# Altium PCB PCB1.PcbDoc
Units mil, origin at the board's own origin, x right, y up, seen from the top; angles counter-clockwise.
Board outline 2580 x 2395 mil, 2 copper layers (Top Layer, Bottom Layer); 19 components, 23 nets, 96 pads, 1 vias.
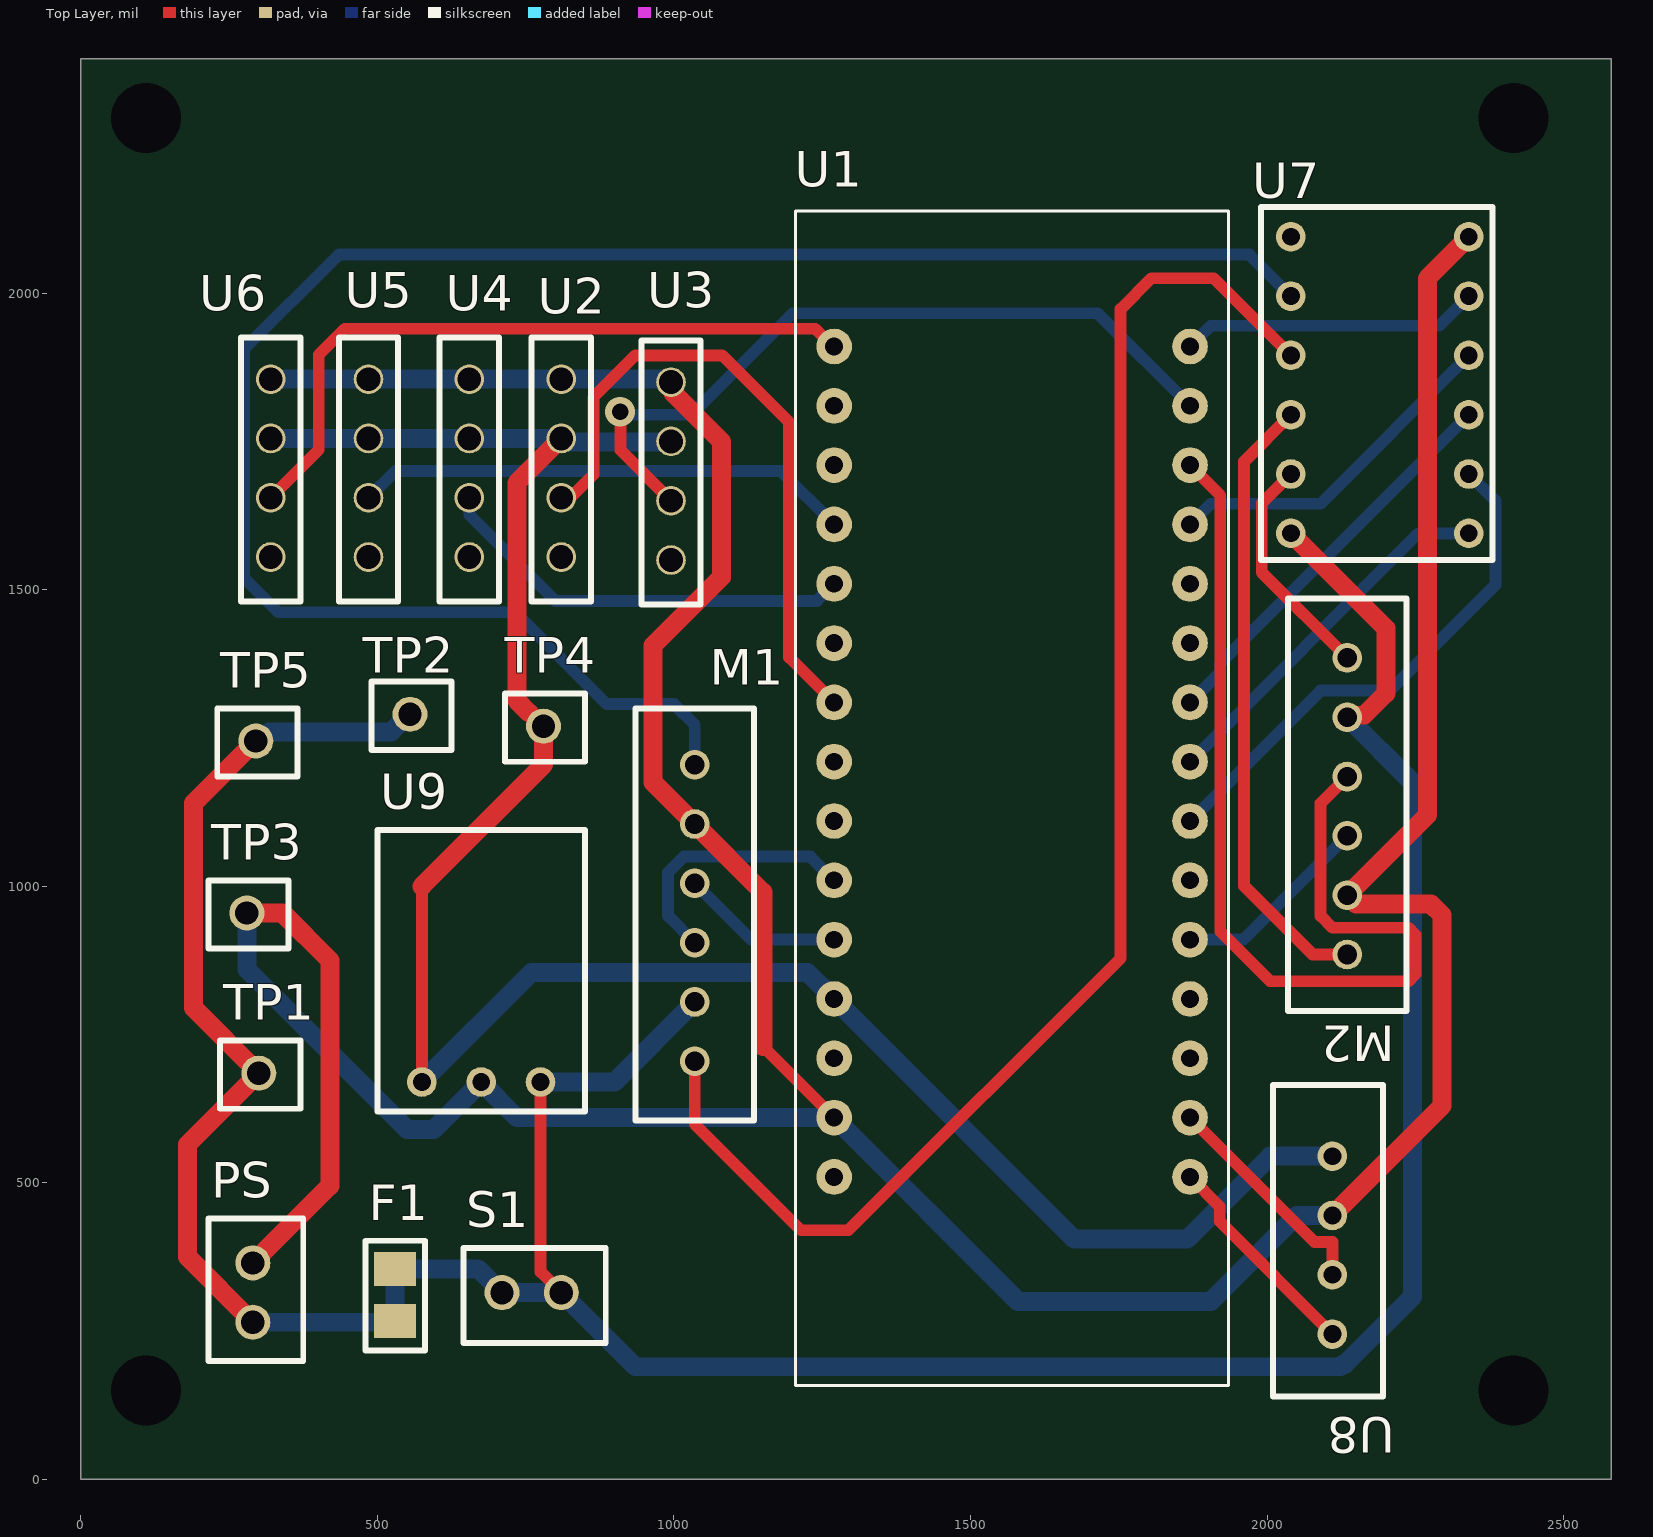
[diagram p0: Top Layer view]
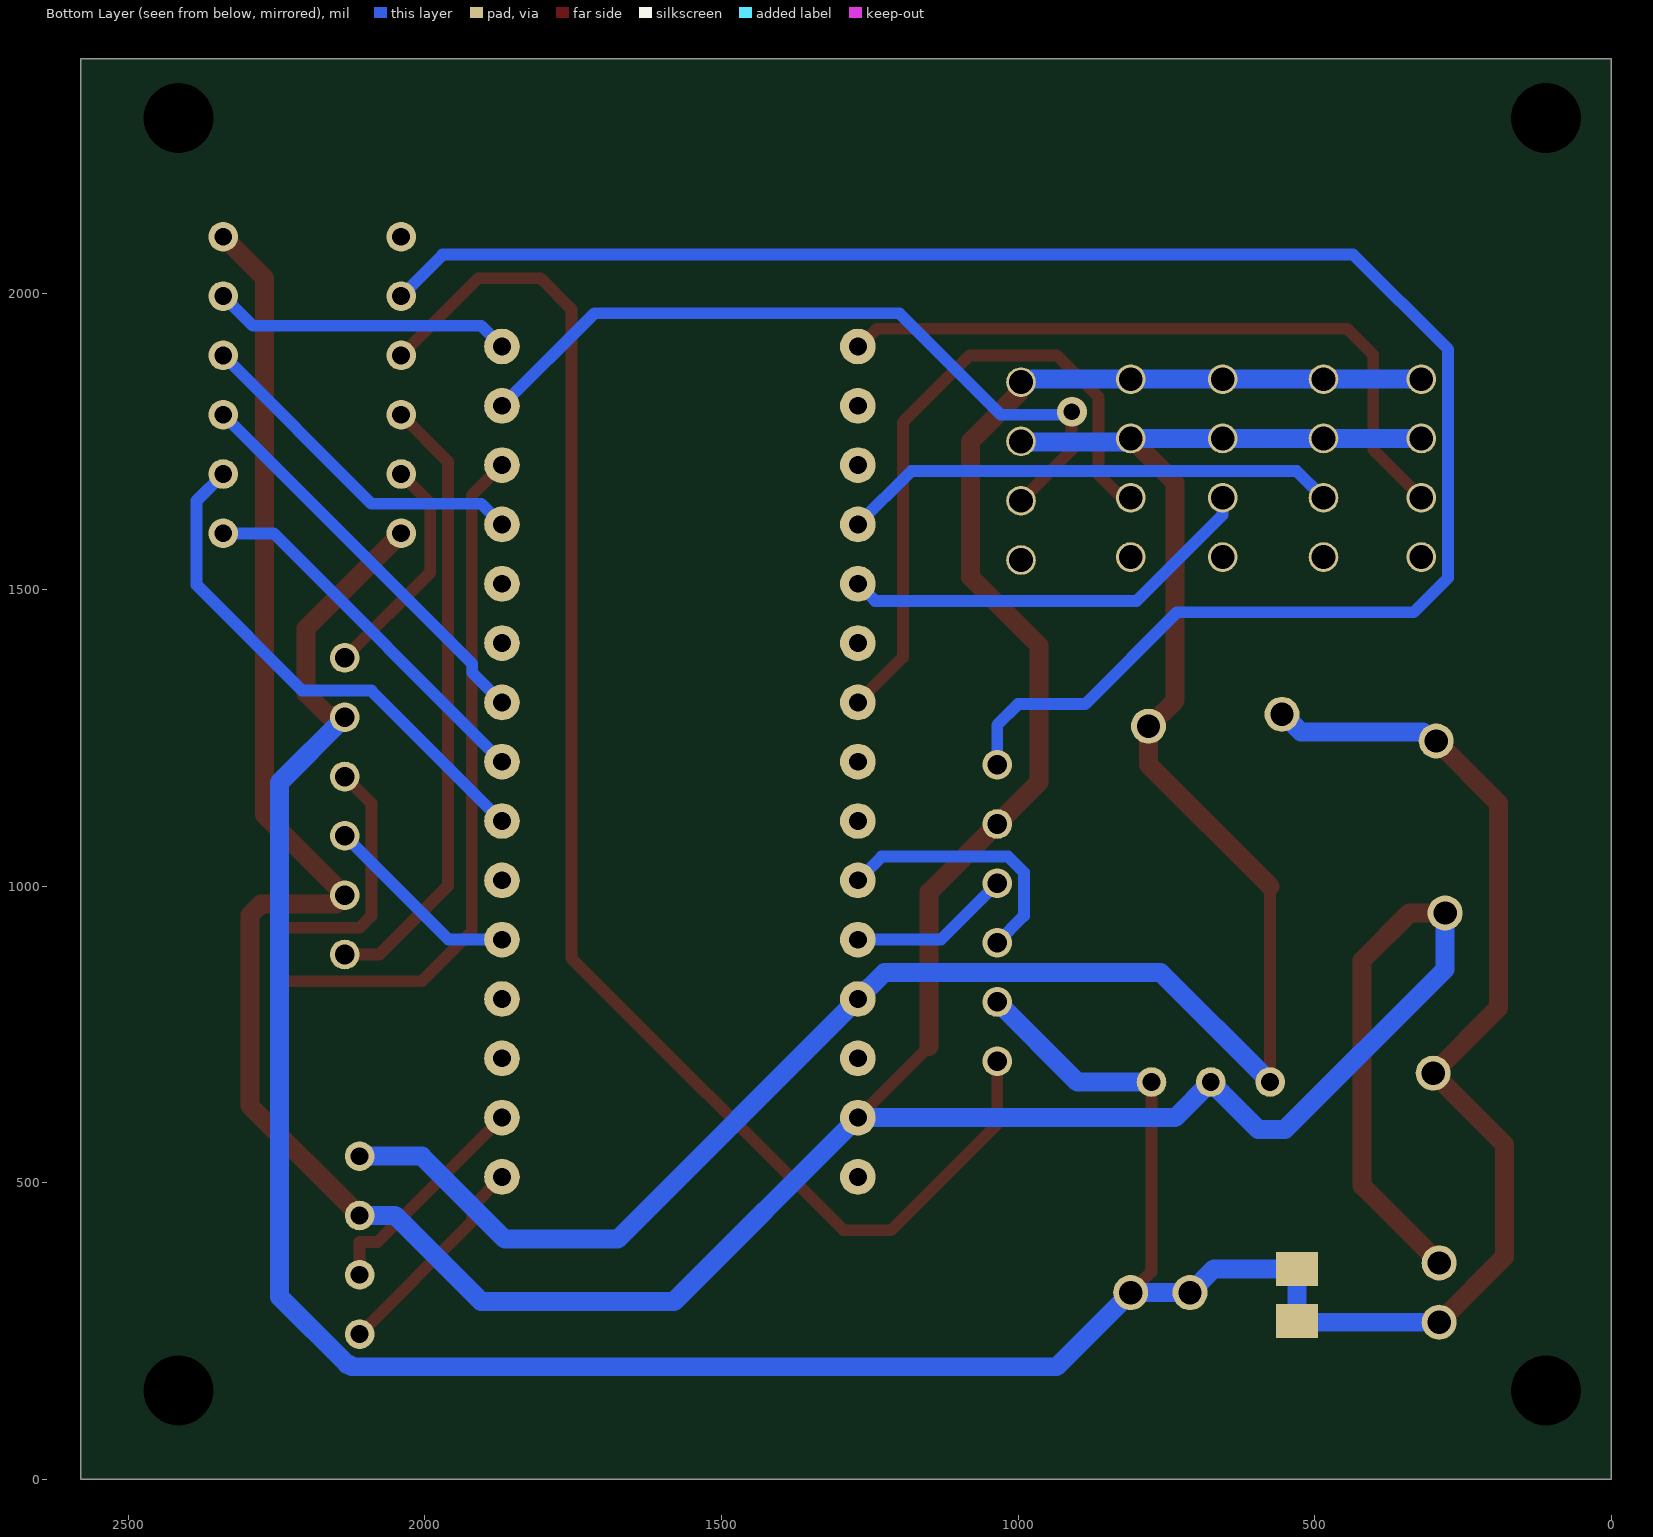
[diagram p1: Bottom Layer view, seen from below]

## Layer stack, top to bottom
Top Solder: solder mask 0.4, Solder Resist, Dk 3.5
Top Layer: signal copper 1.4
Dielectric 1: dielectric 12.6, FR-4, Dk 4.8
Bottom Layer: signal copper 1.4
Bottom Solder: solder mask 0.4, Solder Resist, Dk 3.5

## Board outline
0,0 2580,0 2580,2395 0,2395

## Design rules (kind name [scope] priority, off if disabled: settings)
Clearance [All] p1: gap=10 ignorepadtopadclearanceinfootprint=FALSE except(0: Arc-Hole Track-Hole SMDPad-Hole THPad-Hole Via-Hole Fill-Hole Poly-Hole Region-Hole Text-Hole)
PolygonConnect [All] p1: connectstyle=Relief reliefconductorwidth=10 reliefentries=4 polygonreliefangle="90 Angle" airgapwidth=10
RoutingVias [All] p1: holewidth=28 width=50 viastyle="Through Hole" minholewidth=28 minwidth=50 maxholewidth=28 maxwidth=50
SolderMaskExpansion [All] p1: expansion=4 istentingtop=FALSE
Width [All] p1: maxlimit=32 minlimit=20 preferedwidth=20 minimp=50.000000 maximp=50.000000 favimp=50.000000
30 further rules are at their usual default settings.

## Classes and differential pairs
component class Sheet1: F1 M1 M2 PS S1 TP1 TP2 TP3 TP4 TP5 U1 U2 U4 U5 U6 U7 U8 U9

## Components (designator, comment, footprint, x,y, rotation, side; value= is the part's Value field where it differs from the comment)
F1 "FUSE 3A" Fuse 530,267.4 r90 top
M1 "MOTOR WITH ENCODER" OUTPUTa 1035,1205 r0 top
M2 "MOTOR WITH ENCODER" OUTPUTB 2135,885 r180 top
PS "Powesupply" "Power Suply" 290,265 r180 top
S1 "Switch" Switch 710,315 r90 top
TP1 "Testpoints" TP 300,685 r0 top
TP2 "Testpoints" TP 555,1290 r0 top
TP3 "Testpoints" TP 280,955 r0 top
TP4 "Testpoints" TP 780,1270 r0 top
TP5 "Testpoints" TP 295,1245 r0 top
U1 "Nucleo L432KC" "Nucleo L432kc" 1570,1148.39 r180 top
U2 "Ir senssor" "IR sensor" 810,1555 r90 top
U3 "Ir senssor" "IR sensor" 995,1550 r90 top
U4 "Ir senssor" "IR sensor" 655,1555 r90 top
U5 "Ir senssor" "IR sensor" 485,1555 r90 top
U6 "Ir senssor" "IR sensor" 320,1555 r90 top
U7 "DRV8835" "Motor Driver" 2040,2095 r0 top
U8 "Bueotth HC06" Bluetooth 2110,545 r270 top
U9 "Voltage regulator" "Voltage Regulator" 775,670 r270 top

## Footprints (in the part's own frame and the unit in brackets; to place one, negate y for a bottom-side part, rotate by r counter-clockwise, add the part's x,y. Pads: shape width x height; smd on the part's side, far side on the other; paste and mask are expansions set on the pad)
Bluetooth [mil] "Bluetooth"
  round 50 hole 30: 1(0,0) 2(100,0) 3(200,0) 4(300,0)
  silkscreen extent -120,-100 405,85
Fuse [mm]
  rect 1.45x1.8 all layers, no hole: 1(0,0) 2(2.225,0)
  silkscreen extent -1.27,-1.27 3.43,1.27
"IR sensor" [mil]
  round 50 hole 40: 1(0,0) 2(100,0) 3(200,0) 4(300,0)
  silkscreen extent -75,-50 370,50
"Motor Driver" [mil]
  round 50 hole 30: 1(0,0) 2(0,-100) 3(0,-200) 4(0,-300) 5(0,-400) 6(0,-500) 7(300,0) 8(300,-100) 9(300,-200) 10(300,-300) 11(300,-400) 12(300,-500)
  silkscreen extent -50,-545 340,50
"Nucleo L432kc" [mm]
  round 1.53 hole 0.762: 1(-7.62,16.215) 2(-7.62,13.675) 3(-7.62,11.135) 4(-7.62,8.595) 5(-7.62,6.055) 6(-7.62,3.515) 7(-7.62,0.975) 8(-7.62,-1.565) 9(-7.62,-4.105) 10(-7.62,-6.645) 11(-7.62,-9.185) 12(-7.62,-11.725) 13(-7.62,-14.265) 14(-7.62,-16.805) 15(-7.62,-19.345) 16(7.62,16.215) 17(7.62,13.675) 18(7.62,11.135) 19(7.62,8.595) 20(7.62,6.055) 21(7.62,3.515) 22(7.62,0.975) 23(7.62,-1.565) 24(7.62,-4.105) 25(7.62,-6.645) 26(7.62,-9.185) 27(7.62,-11.725) 28(7.62,-14.265) 29(7.62,-16.805) 30(7.62,-19.345)
  silkscreen extent -9.27,-25.14 9.27,25.14
OUTPUTa [mil]
  round 50 hole 33: 1(0,0) 2(0,-100) 3(0,-200) 4(0,-300) 5(0,-400) 6(0,-500)
  silkscreen extent -100,-600 100,95
OUTPUTB [mil]
  round 50 hole 33: 1(0,0) 2(0,-100) 3(0,-200) 4(0,-300) 5(0,-400) 6(0,-500)
  silkscreen extent -100,-600 100,95
"Power Suply" [mm]
  round 1.5 hole 1: 1(0,0) 2(0,-2.54)
  silkscreen extent -2.16,-4.44 1.91,1.65
Switch [mm]
  round 1.5 hole 1: 1(0,0) 2(0,-2.54)
  silkscreen extent -2.16,-4.44 1.91,1.65
TP [mm]
  round 1.5 hole 1: 1(0,0)
  silkscreen extent -1.65,-1.52 1.78,1.4
"Voltage Regulator" [mil]
  round 50 hole 30: 1(0,0) 2(0,-100) 3(0,-200)
  silkscreen extent -425,-275 50,75

## Part data
F1: library part Fuse
M1: library part OutputA
M2: library part OutputB
U2 U3 U4 U5 U6: library part "Ir proximity sensor"
U7: library part "Motor driver"
U8: "3.7 cm x 1.5 cm"

## Free pads (board coordinates)
  round 59.06 hole 118.11: 1(110,150) 1(110,2295) 3(2415,2295) 4(2415,150)

## Via types
v1: diameter 50, hole 28, Top Layer to Bottom Layer, 1 vias

## Nets (pads, with @x,y where several pads share a name; then routed paths per layer and width w, separated by ;. In a path a pad name is that pad's centre, name@x,y a point inside that pad or via, vN(x,y) a via of type N, cw(c..) or ccw(c..) an arc to the next point about the centre after c; other vN are vias at no path point)
5V: TP4.1 U1.19 U2.3 U3.3 U4.3 U5.3 U6.3 U8.1 U9.3 | length 3768.7
  Top Layer w20: U9.3 575,1000 ; 756.18,1292.01 778.18,1270 TP4.1
  Top Layer w32: 575,1000 780,1205 TP4.1 ; 756.18,1292.01 735,1313.18 735,1680 U2.3
  Bottom Layer w20: U2.3 U2.3@816,1749 ; 928.64,1749 934.64,1755 ; U3.3@990,1755 U3.3
  Bottom Layer w32: U6.3 U5.3 U4.3 U2.3 ; U9.3 760,855 1225,855 U1.19 1675,405 1865.12,405 2005.12,545 U8.1 ; U2.3@816,1749 928.64,1749 U3.3@994,1749
7.4V: F1.1 F1.2 M1.5 M2.5 PS.1 S1.1 S1.2 TP1.1 TP2.1 TP5.1 U7.6 U9.1 | length 5729.7
  Top Layer w20: U9.1 775,350 S1.2
  Top Layer w31: M2.5 2138.64,1288.64 2163.64,1288.64 2200,1325
  Top Layer w32: PS.1 180,375 180,565 TP1.1 190,795 190,1140 TP5.1 ; U7.6 2200,1435 2200,1325
  Bottom Layer w32: PS.1 527.6,265 F1.1 F1.2 670,355 S1.1 S1.2 935,190 2123.31,190 2127.31,194 2131.12,194 2245,307.88 2245,1175 M2.5 ; TP5.1 302.32,1245 317.32,1260 522.73,1260 552.73,1290 TP2.1 ; U9.1 900,670 M1.5
GND: M1.2 M2.2 PS.2 TP3.1 U1.17 U2.4 U3.4 U4.4 U5.4 U6.4 U7.7 U8.2 U9.2 | length 7098.3
  Top Layer w20: 1150,730 U1.17 ; M2.2 M2.2@2150,970
  Top Layer w32: TP3.1 340,955 420,875 420,495 PS.2 ; U3.4 998.44,1846.56 998.44,1831.56 1080,1750 1080,1521 965,1406 965,1175 M1.2 1150,990 1150,730 ; U8.2 2295,630 2295,951.25 2276.25,970 M2.2@2150,970 ; M2.2 2270,1120 2270,2025 U7.7
  Bottom Layer w32: TP3.1 280,860 550,590 595,590 U9.2 735,610 U1.17 1580,300 1905,300 2050,445 U8.2 ; U6.4 U5.4 U4.4 U2.4 977.27,1855 978.83,1853.44 991.56,1853.44 U3.4
NetM1_1: M1.1 U7.2 | length 3175
  Bottom Layer w20: M1.1 1035,1272 1000,1307 887,1307 732,1462 333,1462 275,1520 275,1905 435,2065 1970,2065 U7.2
NetM1_6: M1.6 U7.3 | length 2544.7
  Top Layer w20: M1.6 1035,599 1214,420 1294,420 1753,879 1753,1973 1805,2025 1910,2025 U7.3
NetM2_1: M2.1 U7.4 | length 1049
  Top Layer w20: U7.4 1961,1716 1961,1000.69 2076.69,885 M2.1
NetM2_6: M2.6 U7.5 | length 389.9
  Top Layer w20: U7.5 1991,1646 1991,1529 M2.6
PA0: U1.27 U5.2 | length 840.9
  Bottom Layer w20: U5.2 530,1700 1180,1700 U1.27
PA1: U1.26 U4.2 | length 716.1
  Bottom Layer w20: U4.2 655,1626 800,1481 1241,1481 U1.26
PA2: M1.3 U1.20 | length 274.4
  Bottom Layer w20: M1.3 1130,910 U1.20
PA4: U1.24 U2.2 | length 1109
  Top Layer w20: U2.2@815,1645 864.12,1694.12 864.12,1824.12 935,1895 1081,1895 1194,1782 1194,1386 U1.24
PA7: M1.4 U1.21 | length 444.8
  Bottom Layer w20: M1.4 990,950 990,1023.64 1016.36,1050 1230,1050 U1.21
PA8: U1.12 U7.9 | length 588.1
  Bottom Layer w20: U1.12 1905,1645 2090,1645 U7.9
PA9: U1.1 U8.4 | length 364.4
  Top Layer w20: U1.1 1920,460 1920,435 U8.4
PA10: U1.2 U8.3 | length 382
  Top Layer w20: U1.2 2080,400 2110,400 U8.3
PA11: M2.4 U1.13 | length 1669.1
  Top Layer w20: U1.13 1921,1659 1921,924 2005,840 2238.28,840 2250,851.72 2250,918.28 2238.28,930 2110,930 2090,950 2090,1140 M2.4
PA12: M2.3 U1.5 | length 337.5
  Bottom Layer w20: U1.5 1960,910 M2.3
PB1: U1.9 U7.10 | length 679.7
  Bottom Layer w20: U1.9 1920,1360 1920,1375 U7.10
PB3: U1.30 U6.2 | length 1174.2
  Top Layer w20: U6.2 401.04,1736.04 401.04,1896.04 445,1940 1238.17,1940 1268.17,1910 U1.30
PB4: U1.15 U7.8 | length 505.2
  Bottom Layer w20: U1.15 1905,1945 2290,1945 U7.8
PB5: U1.14 U3.2 | length 1284
  Top Layer w20: v1(909.12,1800) 910,1799.12 910,1735 U3.2
  Bottom Layer w20: v1(909.12,1800) 914.12,1795 1029,1795 1200,1966 1714,1966 U1.14
PB6: U1.8 U7.12 | length 629.5
  Bottom Layer w20: U1.8 2255,1595 U7.12
PB7: U1.7 U7.11 | length 885.5
  Bottom Layer w20: U1.7 2090,1330 2207,1330 2385,1508 2385,1650 U7.11
pads on no net: U1.3 U1.4 U1.6 U1.10 U1.11 U1.16 U1.18 U1.22 U1.23 U1.25 U1.28 U1.29 U2.1 U3.1 U4.1 U5.1 U6.1 U7.1

## Silkscreen, mask and mechanical layers (free items; w line width, h text height)
Mechanical 1:
  lines w10: 0,0 2578.63,0 2578.63,2392.23 0,2392.23 0,0